# EAGLE board conector (EAGLE 7.3.0)
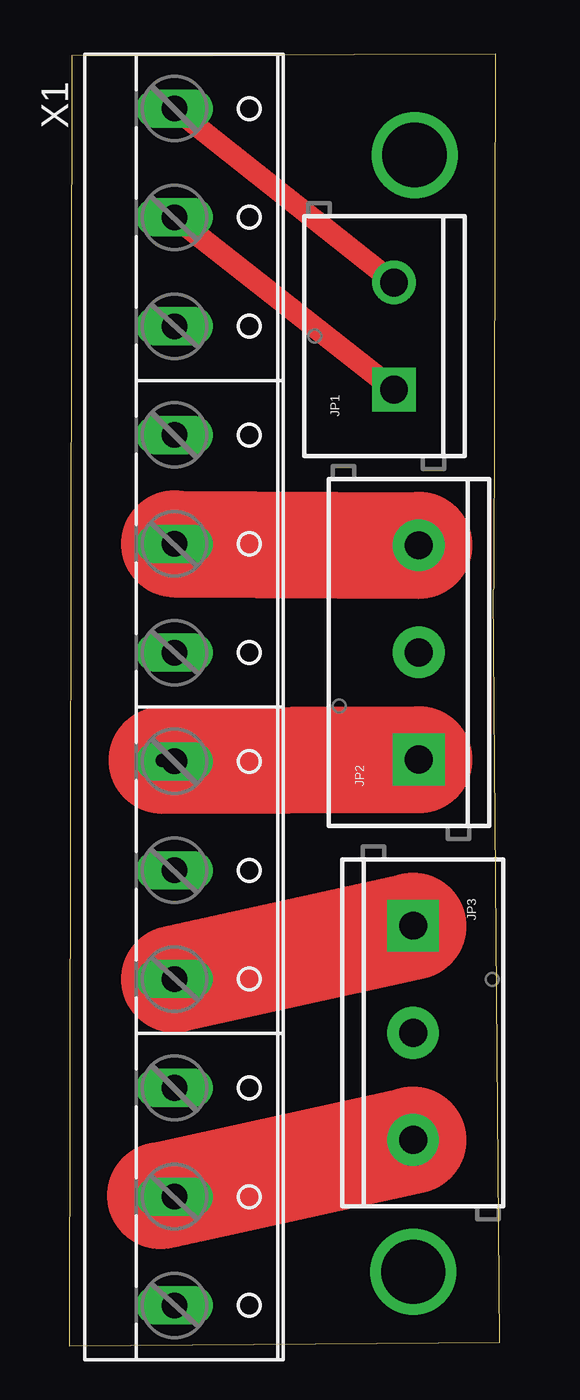
[diagram p0: board, top side]
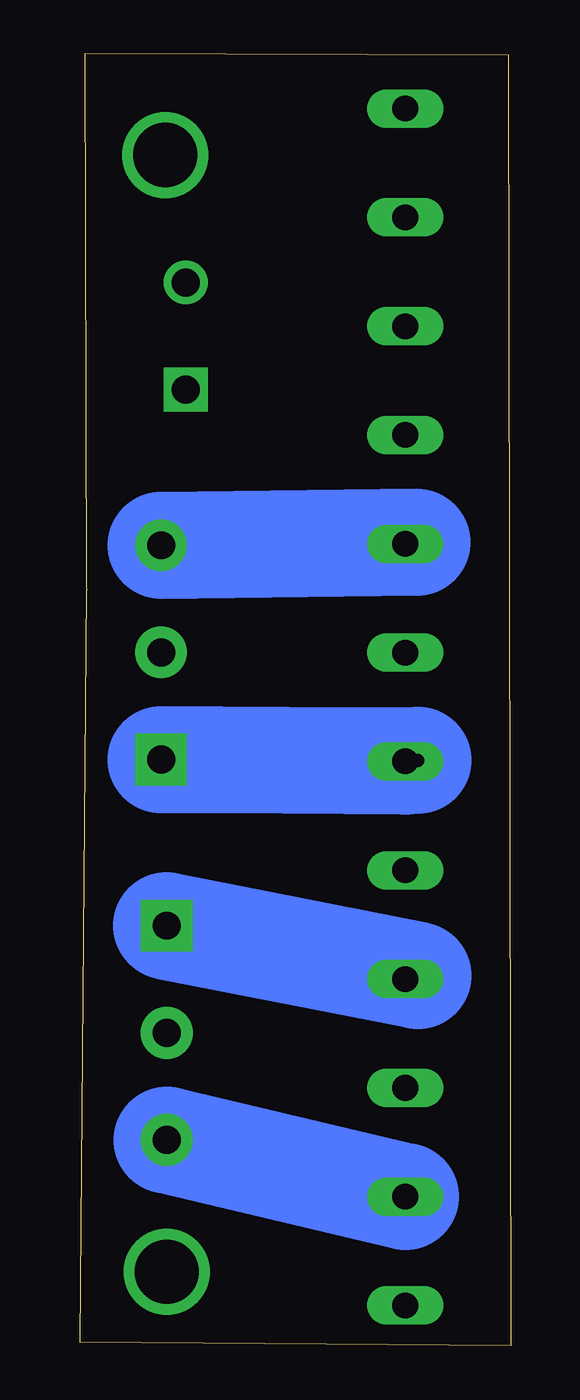
[diagram p1: board, bottom side, seen from below]

Size 20.09 x 60.34 mm. Coordinates in mm from the lower left corner, seen from the top.
Outline: 0,0 20.09,0.18 19.78,35.3 19.81,35.44 19.88,60.34 0.11,60.26 0,0
Copper layers (1*16): Top 0.035mm / dielectric 1.5mm / Bottom 0.035mm
Design rules "default": minimum track width 0.6mm, minimum drill 30mil, track to track 20mil, track to pad 20mil, pad to pad 20mil, via to via 20mil, smd to smd 8mil, copper to edge 8mil, drill to drill 8mil, minimum pad ring 10mil, minimum via ring 8mil, stop-mask expansion 4mil, vias tented up to drill 0mil, thermal gap 10mil

## Footprints (pad centres in the part's own frame; a part is rotated, then mirrored left to right if it is on the bottom)
SCREWTERMINAL-5MM-2 = drill 1.3 pad 2.032 square: 1 0,0 | drill 1.3 pad 2.032: 2 5,0
SCREWTERMINAL-5MM-3 = drill 1.3 pad 2.413 square: 1 0,0 | drill 1.3 pad 2.413: 2 5,0; 3 10,0
W237-12P = drill 1.194 long: 1 -27.94,-0.635; 2 -22.86,-0.635; 3 -17.78,-0.635; 4 -12.7,-0.635; 5 -7.62,-0.635; 6 -2.54,-0.635; 7 2.54,-0.635; 8 7.62,-0.635; 9 12.7,-0.635; 10 17.78,-0.635; 11 22.86,-0.635; 12 27.94,-0.635

## Placement (x,y rotation side)
JP1  M025MM  [SCREWTERMINAL-5MM-2]  15.16,44.65 90 top
JP2  [SCREWTERMINAL-5MM-3]  16.31,27.38 90 top
JP3  [SCREWTERMINAL-5MM-3]  16.05,19.62 270 top
X1  [W237-12P]  5.55,29.83 270 top

## Library data of the parts
JP1-JP3 = SparkFun-Connectors
X1 = con-wago-508; OC_FARNELL: unknown; OC_NEWARK: unknown

## Nets
N$1: JP1.2 X1.1
N$2: JP2.3 X1.5
N$3: JP1.1 X1.2
N$5: JP3.1 X1.9
N$6: JP3.3 X1.11
N$7: JP2.1 X1.7

## Tracks (layer width: path | path; a pad name or v marks a point on that pad's centre or on a via)
N$1
  Top 1: X1.1 JP1.2
N$2  (via drill 0.6)
  Top 5: X1.5 v16.32,37.38
  Bottom 5: v16.32,37.38 4.36,37.53 JP2.3
N$3
  Top 1: X1.2 JP1.1
N$5  (via drill 0.6)
  Top 5: X1.9 v16.04,19.59
  Bottom 5: v16.04,19.59 4.31,17.3 JP3.1
N$6  (via drill 0.6)
  Top 5: v16.03,9.6 4.27,7.02 JP3.3
  Bottom 5: X1.11 v16.03,9.6
N$7  (via drill 0.6)
  Top 5: v4.33,27.34 16.33,27.38
  Bottom 5: v4.33,27.34 JP2.1 X1.7
N$12  (via drill 3)
  other vias: 16.05,3.47
N$16  (via drill 3)
  other vias: 16.12,55.6